# Altium PCB bms52Pcb.PcbDoc (part 2 of 2)
Units mm, origin at the board's own origin, x right, y up, seen from the top; angles counter-clockwise.
Board outline 103.58 x 54.94 mm, 2 copper layers (Top Layer, Bottom Layer); 108 components, 83 nets, 349 pads, 97 vias.
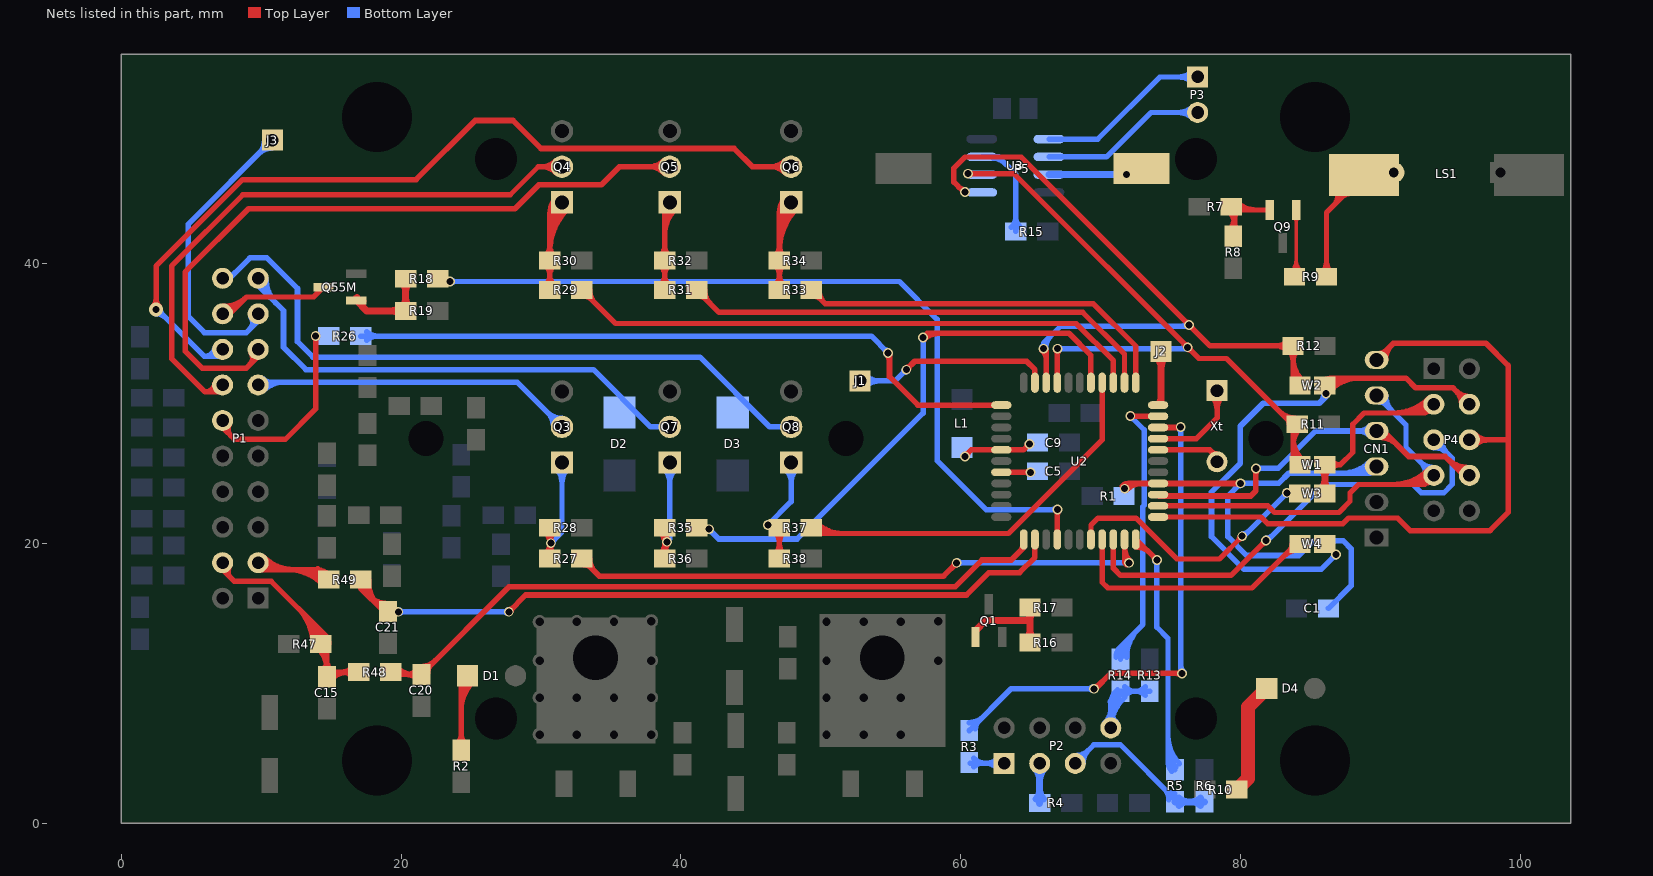
[diagram p2: the nets of this part, all layers, seen from the top]

## Via types
v1: diameter 0.7, hole 0.5, Top Layer to Bottom Layer, tented both sides, 77 vias
v2: diameter 1, hole 0.7, Top Layer to Bottom Layer, tented both sides, 16 vias
v3: diameter 0.7, hole 0.5, Top Layer to Bottom Layer, 2 vias
v4: diameter 1.4, hole 1, Top Layer to Bottom Layer, tented both sides, 1 vias
v5: diameter 1, hole 0.5, Top Layer to Bottom Layer, tented both sides, 1 vias

## Nets (pads, with @x,y where several pads share a name; then routed paths per layer and width w, separated by ;. In a path a pad name is that pad's centre, name@x,y a point inside that pad or via, vN(x,y) a via of type N, cw(c..) or ccw(c..) an arc to the next point about the centre after c; other vN are vias at no path point) (continued)
LCD01: U2.40 W3.1 | length 20.1
  Top Layer w0.381: U2.40@69.29,20.27 69.29,21.29 69.79,21.79 72.51,21.79 75.428,18.872 78.472,18.872 v1(80.1,20.5) ; v1@79.941,20.5 cw(c79.555,20.5) 79.828,20.228 cw(c80.1,19.955) v1@80.1,20.341
  Bottom Layer w0.381: v1@80.1,20.659 ccw(c80.1,21.286) 80.543,20.843 ; v1@80.15,20.45 v1(83.3,23.6) ; v1@83.141,23.6 cw(c82.755,23.6) 83.028,23.328 cw(c83.3,23.055) v1@83.3,23.441
LCD02: U2.41 W4.1 | length 20.4
  Top Layer w0.381: U2.41@70.09,20.27 70.09,17.21 70.5,16.8 80.8,16.8 83.954,19.954 W4.1@84.224,19.954 ; 83.094,19.094 cw(c84.097,18.09) W4.1@84.097,19.51 ; 83.44,19.44 ccw(c82.926,19.954) W4.1@83.653,19.954
LCD03: P4.5 U2.42 | length 36.6
  Top Layer w0.4: U2.42@70.89,20.27 70.89,18.21 71.4,17.7 79.3,17.7 v1(81.8,20.2) ; v1@81.65,20.2 cw(c81.288,20.2) 81.544,19.944 cw(c81.8,19.688) v1@81.8,20.05
  Bottom Layer w0.381: v1@81.8,20.1 85.9,24.2 92.3,24.2 92.9,23.6 94.5,23.6 95.1,24.2 95.1,26.08 P4.5@93.79,27.39 ; v1@81.8,20.359 ccw(c81.8,20.986) 82.243,20.543 ; P4.5@93.79,26.831 cw(c93.79,25.48) 94.745,26.435 cw(c95.7,27.39) P4.5@94.349,27.39
LCD04: CN1.6 P4.6 U2.1 | length 53.9
  Top Layer w0.381: U2.1@74.09,21.87 81.43,21.87 81.9,21.4 87.3,21.4 87.7,21.8 91.2,21.8 92.1,20.9 97.8,20.9
  Top Layer w0.4: CN1.6@89.7,33.1 90.9,34.3 97.5,34.3 99.1,32.7 99.1,22.2 97.8,20.9 ; CN1.6@89.9,33.55 ccw(c89.9,34.154) 90.327,33.727 ; CN1.6@90.35,33.1 cw(c91.919,33.1) 90.81,34.21 ; P4.6@96.33,27.39 99.09,27.39 ; P4.6@96.719,27.001 cw(c97.658,26.062) 97.658,27.39 cw(c97.658,28.718) P4.6@96.719,27.779
LCD05: CN1.5 P4.7 U2.2 | length 38.9
  Top Layer w0.381: U2.2@74.09,22.67 81.93,22.67 82.4,22.2 87,22.2 87.8,23 87.8,23.6 88.4,24.2 93.14,24.2 P4.7@93.79,24.85 ; 90.87,24.2 ccw(c90.87,27.77) P4.7@93.394,25.246 ; 91.79,24.2 ccw(c91.79,26.85) P4.7@93.664,24.976 ; 92.71,24.2 ccw(c92.71,25.93) P4.7@93.933,24.707
  Bottom Layer w0.381: CN1.5@89.7,30.56 91.8,28.46 91.8,26.84 P4.7@93.79,24.85 ; CN1.5@89.9,30.101 cw(c89.9,29.474) 90.343,29.917 ; CN1.5@90.359,30.56 ccw(c91.952,30.56) 90.826,29.434 ; P4.7@93.231,24.85 ccw(c91.88,24.85) 92.835,25.805 ccw(c93.79,26.76) P4.7@93.79,25.409
LCD06: CN1.4 P4.8 U2.3 | length 33.7
  Top Layer w0.4: U2.3@74.09,23.47 74.183,23.377 80.705,23.377 81.077,23.749 v1(81.077,25.349) ; U2.3@74.593,23.523 ccw(c74.945,23.875) 74.945,23.377 ; v1@80.971,25.243 cw(c80.715,24.987) 81.077,24.987 cw(c81.439,24.987) v1@81.183,25.243 ; CN1.4@89.7,28.02 90.18,28.02 92,26.2 94.6,26.2 95.95,24.85 P4.8@96.33,24.85 ; CN1.4@89.9,27.57 cw(c89.9,25.808) 91.146,27.054 ; 94.79,26.01 ccw(c96.265,27.484) P4.8@96.316,25.4 ; 95.45,25.35 ccw(c96.297,26.197) P4.8@96.326,25
  Bottom Layer w0.4: v1(81.077,25.349) 82.665,25.349 85.336,28.02 CN1.4@89.7,28.02 ; v1@81.183,25.243 cw(c81.439,24.987) 81.439,25.349 cw(c81.439,25.711) v1@81.183,25.455 ; CN1.4@89.182,27.702 ccw(c88.414,26.934) 88.414,28.02 ccw(c88.414,29.106) CN1.4@89.182,28.338
LEDINDICATOR01: P1.12 R26.1 | length 15.3
  Top Layer w0.381: P1.12@7.25,28.27 8.088,27.432 11.732,27.432 13.9,29.6 v1(13.9,34.8) ; P1.12@7.404,28.68 ccw(c7.867,28.41) 7.488,28.032 ; P1.12@7.733,28.488 ccw(c8.309,28.153) 7.838,27.682 ; v1@13.787,34.687 cw(c13.515,34.415) 13.9,34.415 cw(c14.285,34.415) v1@14.013,34.687
LEDINDICATORCTRL01: R26.2 U2.23 | length 51.5
  Top Layer w0.4: v1@54.694,33.494 cw(c54.196,32.996) 54.9,32.996 ; v1@54.9,33.6 54.9,31.9 56.93,29.87 U2.23@62.89,29.87
  Bottom Layer w0.4: R26.2@17.118,34.8 53.6,34.8 v1(54.8,33.6) ; R26.2@17.552,34.492 cw(c18.295,33.75) 18.295,34.8 cw(c18.295,35.85) R26.2@17.552,35.108 ; v1@54.65,33.6 ccw(c54.288,33.6) 54.544,33.856 ccw(c54.8,34.112) v1@54.8,33.75
LEDLIGHT01: P1.13 Q3.2 | length 28.6
  Bottom Layer w0.381: P1.13@9.79,30.81 10.476,31.496 28.314,31.496 Q3.2@31.5,28.31 ; P1.13@9.916,31.184 cw(c10.67,30.43) 10.67,31.496 ; P1.13@10.186,30.914 cw(c11.59,29.51) 11.59,31.496 ; P1.13@10.186,31.706 ccw(c10.692,32.212) 10.692,31.496 ; Q3.2@30.891,28.31 ccw(c29.419,28.31) 30.46,29.35 ccw(c31.5,30.391) Q3.2@31.5,28.919
LEDLIGHT02: P1.14 Q4.2 | length 46.3
  Top Layer w0.381: 6.443,30.81 ccw(c6.443,31.451) P1.14@7.074,31.341 ; P1.14@6.699,31.406 cw(c5.99,31.529) 5.99,30.81 ; P1.14@7.25,30.81 5.99,30.81 ; Q4.2@31.069,46.469 ccw(c30.029,45.429) 30.029,46.9 ccw(c30.029,48.371) Q4.2@31.069,47.331 ; Q4.2@31.5,46.9 29.8,46.9 27.8,44.9 8.7,44.9 3.61,39.809 3.61,33.191 5.99,30.81
LEDLIGHT03: P1.15 Q5.2 | length 52.6
  Top Layer w0.4: 9.202,32.762 ccw(c8.722,33.242) P1.15@9.312,33.578 ; P1.15@9.79,33.35 8.952,32.512 5.788,32.512 4.572,33.728 4.572,39.372 9.1,43.9 28.135,43.9 29.835,45.6 34.3,45.6 35.6,46.9 Q5.2@39.2,46.9 ; Q5.2@38.776,46.476 ccw(c37.751,45.451) 37.751,46.9 ccw(c37.751,48.349) Q5.2@38.776,47.324
LEDLIGHT04: P1.16 Q6.2 | length 66.8
  Top Layer w0.4: v5@2.288,36.912 ccw(c1.776,37.424) 2.5,37.424 ccw(c3.224,37.424) v5@2.712,36.912 ; v5(2.5,36.7) 2.5,39.8 8.674,45.974 21.074,45.974 25.3,50.2 28,50.2 30,48.2 43.8,48.2 45.1,46.9 Q6.2@47.87,46.9 ; Q6.2@47.446,46.476 ccw(c46.421,45.451) 46.421,46.9 ccw(c46.421,48.349) Q6.2@47.446,47.324
  Bottom Layer w0.381: v5@2.5,36.391 cw(c2.5,35.402) 3.199,36.101 ; v5(2.5,36.7) 2.6,36.7 5.95,33.35 ; v5@2.809,36.7 ccw(c3.315,36.7) 2.958,36.342 ; 6.418,33.35 ccw(c6.418,34.021) P1.16@7.075,33.886 ; P1.16@6.702,33.963 cw(c5.95,34.118) 5.95,33.35 ; P1.16@7.25,33.35 5.95,33.35
LEDLIGHTCTRL01: R27.2 U2.43 | length 46.8
  Top Layer w0.381: 71.69,18.814 ccw(c72.214,18.814) v1@71.843,18.443 ; U2.43@71.69,19.733 ccw(c73.133,19.733) v1@72.113,18.713 ; U2.43@71.69,20.27 71.69,18.91 v1(72,18.6)
  Top Layer w0.4: R27.2@32.918,18.9 34.164,17.654 58.754,17.654 v1(59.7,18.6) ; R27.2@33.045,18.465 cw(c33.045,17.721) 33.57,18.247 ; R27.2@33.48,18.9 ccw(c34.836,18.9) 33.877,17.941 ; v1@59.55,18.6 cw(c59.188,18.6) 59.444,18.344 cw(c59.7,18.088) v1@59.7,18.45
  Bottom Layer w0.381: v1(59.7,18.6) v1(72,18.6) ; v1@59.813,18.487 cw(c60.085,18.215) 60.085,18.6 cw(c60.085,18.985) v1@59.813,18.713 ; v1@71.887,18.487 ccw(c71.615,18.215) 71.615,18.6 ccw(c71.615,18.985) v1@71.887,18.713
LEDLIGHTCTRL02: R29.2 U2.14 | length 43.3
  Top Layer w0.381: R29.2@32.918,38.1 35.318,35.7 68.237,35.7 70.89,33.047 U2.14@70.89,31.47 ; R29.2@33.045,37.655 cw(c33.045,36.889) 33.587,37.431 ; R29.2@33.489,38.1 ccw(c34.869,38.1) 33.893,37.124
LEDLIGHTCTRL03: R31.2 U2.13 | length 36.2
  Top Layer w0.381: R31.2@41.118,38.1 42.718,36.5 68.707,36.5 71.69,33.517 U2.13@71.69,31.47 ; R31.2@41.245,37.655 cw(c41.245,36.889) 41.787,37.431 ; R31.2@41.689,38.1 ccw(c43.069,38.1) 42.093,37.124
LEDLIGHTCTRL04: R33.2 U2.12 | length 29.1
  Top Layer w0.381: R33.2@49.318,38.1 50.318,37.1 69.478,37.1 72.49,34.088 U2.12@72.49,31.47 ; R33.2@49.445,37.655 cw(c49.445,36.889) 49.987,37.431 ; R33.2@49.889,38.086 ccw(c51.137,38.047) 50.254,37.164
LIGHTADC01: C20.2 R48.2 U2.34 | length 55
  Top Layer w0.381: R48.2@19.268,10.8 19.443,10.625 C20.2@21.458,10.625 ; R48.2@19.71,10.486 cw(c20.047,10.148) 20.047,10.625 ; R48.2@19.71,11.114 ccw(c20.89,12.295) C20.2@20.89,10.625 ; C20.2@21.143,10.311 ccw(c20.384,9.552) 20.384,10.625 ccw(c20.384,11.699) C20.2@21.143,10.94
  Top Layer w0.4: C20.2@21.458,10.625 27.732,16.9 59.6,16.9 61.5,18.8 63.6,18.8 64.49,19.69 U2.34@64.49,20.27 ; C20.2@21.458,11.187 ccw(c21.458,12.544) 22.417,11.585 ; C20.2@21.893,10.752 cw(c22.636,10.752) 22.11,11.278 ; 64.27,19.47 ccw(c63.92,19.82) U2.34@64.415,19.82
LIGHTSENS01: C15.1 P1.4 R47.2 R48.1 | length 31.4
  Top Layer w0.381: P1.4@7.25,18.11 8.088,17.272 10.728,17.272 14.7,13.3 C15.1@14.7,10.461 15.039,10.8 R48.1@16.982,10.8 ; P1.4@7.404,18.52 ccw(c7.867,18.25) 7.488,17.872 ; P1.4@7.733,18.328 ccw(c8.309,17.993) 7.838,17.522 ; 12.634,15.366 cw(c10.068,12.8) R47.2@13.697,12.8 ; 13.284,14.716 cw(c11.369,12.8) R47.2@14.078,12.8 ; 13.935,14.065 cw(c12.669,12.8) R47.2@14.459,12.8 ; R47.2@14.081,12.486 cw(c12.587,10.991) C15.1@14.7,10.991 ; R47.2@14.35,12.755 cw(c13.507,11.911) 14.7,11.911 ; C15.1@14.386,10.902 ccw(c13.627,11.661) 14.7,11.661 ccw(c15.773,11.661) C15.1@15.014,10.902 ; R47.2@14.585,13.415 cw(c13.97,12.8) R47.2@14.84,12.8 ; C15.1@14.745,10.543 cw(c15.366,9.922) 15.366,10.8 ; C15.1@15.014,10.273 cw(c16.286,9.002) R48.1@16.286,10.8 ; R48.1@16.541,10.486 ccw(c15.782,9.727) 15.782,10.8 ccw(c15.782,11.873) R48.1@16.541,11.114
NetC5_1: C5.1 U2.29 | length 2.6
  Top Layer w0.4: U2.29@62.89,25.07 v1(64.97,25.07) ; v1@64.864,24.964 ccw(c64.608,24.708) 64.608,25.07 ccw(c64.608,25.432) v1@64.864,25.176
NetC9_2: C9.2 L1.1 U2.27 | length 6
  Top Layer w0.381: v1(60.3,26.2) 60.3,26.24 60.73,26.67 U2.27@62.89,26.67 64.47,26.67 v1(64.9,27.1) ; v1@60.459,26.2 cw(c60.941,26.2) 60.601,26.541 ; v1@64.741,27.1 cw(c64.355,27.1) 64.628,26.828 cw(c64.9,26.555) v1@64.9,26.94
NetD1_1: D1.1 R2.1 | length 11.9
  Top Layer w0.381: R2.1@23.986,5.659 ccw(c23.227,6.418) 24.3,6.418 ccw(c25.373,6.418) R2.1@24.614,5.659 ; R2.1@24.3,5.218 24.3,10.079 D1.1@24.748,10.527 ; 24.3,8.067 cw(c27.208,8.067) D1.1@25.152,10.123 ; 24.3,8.986 cw(c26.288,8.986) D1.1@24.882,10.392 ; D1.1@24.3,9.906 cw(c25.368,9.906) D1.1@24.613,10.662
NetD4_1: D4.1 R10.1 | length 8.1
  Top Layer w1: R10.1@79.718,2.4 80.518,3.2 80.518,8.297 D4.1@81.848,9.627
NetLS1_2: LS1.2 LS1.2A R9.2 | length 14.9
  Top Layer w0.381: R9.2@85.811,39.357 ccw(c85.052,40.116) 86.125,40.116 ccw(c87.199,40.116) R9.2@86.44,39.357 ; R9.2@86.125,39.042 86.125,43.625 LS1.2@88.8,46.3 ; 86.625,44.125 ccw(c85.855,44.896) LS1.2@86.738,45.533 ; 86.942,44.442 ccw(c86.223,45.161) LS1.2@87.047,45.756 ; 87.258,44.758 ccw(c86.59,45.426) LS1.2@87.356,45.979 ; 87.272,44.772 cw(c87.8,44.243) LS1.2@87.8,44.99
NetP2_1: P2.1 R3.2 | length 6.2
  Bottom Layer w0.381: R3.2@60.662,4.27 P2.1@63.09,4.27 ; R3.2@60.914,4.017 cw(c61.524,3.407) 61.524,4.27 ; R3.2@60.914,4.646 ccw(c61.822,5.554) 61.822,4.27 ; P2.1@62.694,3.874 ccw(c61.739,2.919) 61.739,4.27 ccw(c61.739,5.621) P2.1@62.694,4.666
NetP2_3: P2.3 R4.2 | length 6.2
  Bottom Layer w0.5: P2.3@65.276,3.916 cw(c64.423,3.063) 65.63,3.063 cw(c66.837,3.063) P2.3@65.984,3.916 ; R4.2@65.359,1.715 ccw(c64.706,2.368) 65.63,2.368 ; 65.63,2.376 ccw(c66.565,2.376) R4.2@65.904,1.715 ; P2.3@65.63,4.27 65.63,1.402 R4.2@65.632,1.4
NetP2_5: P2.5 R5.1 R6.2 | length 18.3
  Bottom Layer w0.381: P2.5@68.17,4.27 69.5,5.6 71.4,5.6 75.3,1.7 R5.1@75.3,1.527 ; P2.5@68.17,4.829 ccw(c68.17,6.18) 69.125,5.225 ccw(c70.08,4.27) P2.5@68.729,4.27 ; 74.509,2.491 cw(c73.671,1.654) R5.1@74.855,1.654 ; 74.62,2.38 ccw(c75.3,3.06) R5.1@75.3,2.098
  Bottom Layer w0.5: R5.1@75.3,1.527 R6.2@77.4,1.527 ; R5.1@75.572,1.255 cw(c76.229,0.597) 76.229,1.527 cw(c76.229,2.456) R5.1@75.572,1.799 ; R6.2@77.128,1.255 ccw(c76.471,0.597) 76.471,1.527 ccw(c76.471,2.456) R6.2@77.128,1.799
NetP2_8: P2.8 R13.2 R14.2 | length 17.5
  Bottom Layer w0.381: P2.8@70.314,7.206 ccw(c69.359,8.161) 70.71,8.161 ccw(c72.061,8.161) P2.8@71.106,7.206 ; 70.647,8.678 cw(c71.151,8.173) R14.2@71.305,8.871 ; P2.8@70.71,6.716 cw(c73.785,6.716) R14.2@71.701,8.978 ; P2.8@70.71,6.81 70.71,8.742 R14.2@71.4,9.432 R13.2@73.5,9.432 ; 70.71,7.586 cw(c72.984,7.586) R14.2@71.443,9.258 ; 70.71,8.455 cw(c72.183,8.455) R14.2@71.185,9.538 ; 70.731,8.763 ccw(c70.189,9.305) R14.2@70.956,9.305 ; R14.2@71.714,9.117 cw(c72.473,8.359) 72.473,9.432 cw(c72.473,10.505) R14.2@71.714,9.746 ; R13.2@73.186,9.117 ccw(c72.427,8.359) 72.427,9.432 ccw(c72.427,10.505) R13.2@73.186,9.746
NetP3_1: P3.1 U3.1 | length 14.6
  Bottom Layer w0.381: U3.1@66.29,48.875 69.775,48.875 74.216,53.316 P3.1@76.914,53.316 ; P3.1@76.518,52.921 ccw(c75.563,51.965) 75.563,53.316 ccw(c75.563,54.667) P3.1@76.518,53.712
NetP3_2: P3.2 U3.2 | length 14.1
  Bottom Layer w0.381: U3.2@66.29,47.605 70.405,47.605 73.576,50.776 P3.2@76.914,50.776 ; P3.2@76.518,50.381 ccw(c75.563,49.425) 75.563,50.776 ccw(c75.563,52.127) P3.2@76.518,51.172
NetP4_3: P4.3 W1.2 W3.2 | length 23.3
  Top Layer w0.381: W1.2@86.002,25.614 87.114,25.614 ; W1.2@86.463,25.32 cw(c87.114,24.746) 87.114,25.614 ; W1.2@86.463,25.908 ccw(c87.114,26.481) 87.114,25.614 ; 90.918,29.3 ccw(c90.918,32.802) P4.3@93.394,30.326 ; 91.838,29.3 ccw(c91.838,31.882) P4.3@93.664,30.056 ; 92.758,29.3 ccw(c92.758,30.962) P4.3@93.933,29.787 ; P4.3@93.79,29.93 93.16,29.3 88.8,29.3 88,28.5 88,26.5 87.114,25.614
  Top Layer w0.5: W3.2@85.717,23.826 ccw(c85.027,24.516) 86.002,24.516 ; W1.2@85.73,25.341 cw(c85.073,24.684) 86.002,24.684 cw(c86.932,24.684) W1.2@86.275,25.341 ; W3.2@86.002,23.567 W1.2@86.002,25.614 ; 86.002,24.451 ccw(c86.886,24.451) W3.2@86.261,23.826
NetP4_4: P4.4 W2.2 W4.2 | length 45.1
  Top Layer w0.4: W2.2@85.871,31.531 cw(c86.52,30.883) W2.2@86.52,31.8 ; W2.2@86.002,31.273 86.529,31.8 91.8,31.8 92.5,31.1 95.16,31.1 P4.4@96.33,29.93 ; W2.2@86.154,31.248 cw(c87.486,29.917) 87.486,31.8 ; W2.2@86.437,30.966 cw(c88.451,28.951) 88.451,31.8 ; P4.4@95.78,29.93 ccw(c94.452,29.93) 95.391,30.869 ccw(c96.33,31.808) P4.4@96.33,30.48
  Bottom Layer w0.4: 85.703,30.103 ccw(c85.105,30.7) v1@85.95,30.7 ; v1@86.1,30.5 85.6,30 81.6,30 79.959,28.359 79.959,25.705 77.902,23.647 77.902,20.472 80.239,18.136 85.736,18.136 v1(86.8,19.2) ; v1@86.65,19.2 cw(c86.288,19.2) 86.544,18.944 cw(c86.8,18.688) v1@86.8,19.05
  other v1: 86.1,30.7
NetP5_2: P5.2 U3.3 | length 5.5
  Bottom Layer w0.5: U3.3@66.29,46.335 v1(71.835,46.335)
NetP6_1: U2.8 Xt.1 | length 8.8
  Top Layer w0.4: U2.8@74.09,27.47 76.822,27.47 78.308,28.956 Xt.1@78.308,30.8 ; Xt.1@77.911,30.511 cw(c76.952,29.552) 78.308,29.552 ; 78.308,29.592 cw(c79.608,29.592) Xt.1@78.689,30.511
NetP6_3: U2.7 Xt.3 | length 4.6
  Top Layer w0.4: U2.7@74.09,26.67 77.775,26.67 Xt.3@78.112,26.332 ; 77.916,26.529 ccw(c78.3,26.914) Xt.3@78.3,26.37
NetQ1_1: Q1.1 R16.2 R17.2 | length 10.6
  Top Layer w0.381: R16.2@64.536,13.296 R16.2@64.932,12.9
  Top Layer w0.5: Q1.1@61.044,13.296 61.044,13.744 61.771,14.471 64.861,14.471 64.932,14.4 ; R16.2@64.659,13.172 ccw(c64.002,13.83) 64.932,13.83 ccw(c65.861,13.83) R16.2@65.204,13.172 ; R17.2@64.659,15.128 cw(c64.002,14.471) 64.932,14.471 cw(c65.861,14.471) R17.2@65.204,15.128 ; R16.2@64.932,12.9 64.932,14.4 ; R17.2@64.932,15.4 64.932,14.4
NetQ3_1: Q3.1 R27.1 R28.2 | length 15.6
  Top Layer w0.381: R27.1@30.317,19.214 ccw(c29.559,19.973) 30.632,19.973 ccw(c31.705,19.973) R27.1@30.946,19.214 ; R28.2@30.317,20.786 cw(c29.559,20.027) 30.632,20.027 cw(c31.705,20.027) R28.2@30.946,20.786 ; R27.1@30.632,18.9 R28.2@30.632,21.1 ; R27.1@30.632,19.45 cw(c31.25,19.45) v1@30.813,19.887 ; R28.2@30.632,20.55 ccw(c31.25,20.55) v1@30.813,20.113
  Bottom Layer w0.381: v1(30.7,20) 31.5,20.8 Q3.1@31.5,25.77 ; v1@30.7,20.159 ccw(c30.7,20.545) 30.972,20.272 ccw(c31.245,20) v1@30.859,20 ; Q3.1@31.069,25.339 cw(c30.029,24.299) 31.5,24.299 cw(c32.971,24.299) Q3.1@31.931,25.339
NetQ4_1: Q4.1 R29.1 R30.2 | length 23
  Top Layer w0.381: R29.1@30.317,38.414 ccw(c29.559,39.173) 30.632,39.173 ccw(c31.705,39.173) R29.1@30.946,38.414 ; R30.2@30.317,39.886 cw(c29.559,39.127) 30.632,39.127 cw(c31.705,39.127) R30.2@30.946,39.886 ; R30.2@30.317,40.514 ccw(c29.559,41.273) 30.632,41.273 ccw(c31.705,41.273) R30.2@30.946,40.514 ; R29.1@30.632,38.1 R30.2@30.632,40.2 30.632,43.492 ; R30.2@30.632,40.792 cw(c35.068,40.792) Q4.1@31.931,43.929 ; 30.632,41.712 cw(c34.148,41.712) Q4.1@31.662,44.198 ; 30.632,42.632 cw(c33.228,42.632) Q4.1@31.392,44.468 ; 30.632,43.552 cw(c32.308,43.552) Q4.1@31.123,44.737 ; Q4.1@30.896,44.277 cw(c29.972,44.151) 30.632,43.492 ; Q4.1@31.417,43.756 ccw(c31.291,42.832) 30.632,43.492 ; Q4.1@31.5,44.36 30.632,43.492
NetQ5_1: Q5.1 R31.1 R32.2 | length 15
  Top Layer w0.381: R31.1@38.517,38.414 ccw(c37.759,39.173) 38.832,39.173 ccw(c39.905,39.173) R31.1@39.146,38.414 ; R32.2@38.517,39.886 cw(c37.759,39.127) 38.832,39.127 cw(c39.905,39.127) R32.2@39.146,39.886 ; R32.2@38.517,40.514 ccw(c37.759,41.273) 38.832,41.273 ccw(c39.905,41.273) R32.2@39.146,40.514 ; R31.1@38.832,38.1 R32.2@38.832,40.2 38.832,43.992 Q5.1@39.2,44.36 ; 38.832,41.999 cw(c41.561,41.999) Q5.1@39.631,43.929 ; 38.832,42.919 cw(c40.641,42.919) Q5.1@39.362,44.198
NetQ6_1: Q6.1 R33.1 R34.2 | length 22.6
  Top Layer w0.381: R33.1@46.717,38.414 ccw(c45.959,39.173) 47.032,39.173 ccw(c48.105,39.173) R33.1@47.346,38.414 ; R34.2@46.717,39.886 cw(c45.959,39.127) 47.032,39.127 cw(c48.105,39.127) R34.2@47.346,39.886 ; R34.2@46.717,40.514 ccw(c45.959,41.273) 47.032,41.273 ccw(c48.105,41.273) R34.2@47.346,40.514 ; R33.1@47.032,38.1 R34.2@47.032,40.2 47.032,43.522 ; 47.032,40.865 cw(c51.365,40.865) Q6.1@48.301,43.929 ; 47.032,41.784 cw(c50.446,41.784) Q6.1@48.032,44.198 ; 47.032,42.704 cw(c49.526,42.704) Q6.1@47.762,44.468 ; 47.032,43.624 cw(c48.606,43.624) Q6.1@47.493,44.737 ; Q6.1@47.269,44.26 cw(c46.432,44.122) 47.032,43.522 ; Q6.1@47.77,43.759 ccw(c47.631,42.922) 47.032,43.522 ; Q6.1@47.87,44.36 47.032,43.522
NetQ7_1: Q7.1 R35.1 R36.2 | length 16
  Top Layer w0.381: R36.2@38.517,19.214 ccw(c37.759,19.973) 38.832,19.973 ccw(c39.905,19.973) R36.2@39.146,19.214 ; R35.1@38.517,20.786 cw(c37.759,20.027) 38.832,20.027 cw(c39.905,20.027) R35.1@39.146,20.786 ; R36.2@38.832,18.9 R35.1@38.832,21.1 ; R36.2@38.832,19.308 cw(c39.792,19.308) v1@39.113,19.987 ; R35.1@38.832,20.892 ccw(c39.792,20.892) v1@39.113,20.213
  Bottom Layer w0.381: Q7.1@38.769,25.339 cw(c37.729,24.299) 39.2,24.299 cw(c40.671,24.299) Q7.1@39.631,25.339 ; v1@38.887,20.213 ccw(c38.132,20.968) 39.2,20.968 ; v1(39,20.1) 39.2,20.3 Q7.1@39.2,25.77
NetQ8_1: Q8.1 R37.1 R38.2 | length 13.6
  Top Layer w0.381: R38.2@46.717,19.214 ccw(c45.959,19.973) 47.032,19.973 ccw(c48.105,19.973) R38.2@47.346,19.214 ; R37.1@46.717,20.786 cw(c45.959,20.027) 47.032,20.027 cw(c48.105,20.027) R37.1@47.346,20.786 ; R38.2@47.032,18.9 R37.1@47.032,21.1
  Bottom Layer w0.381: v1(46.2,21.3) 47.87,22.97 Q8.1@47.87,25.77 ; v1@46.2,21.459 ccw(c46.2,21.845) 46.472,21.572 ccw(c46.745,21.3) v1@46.359,21.3 ; Q8.1@47.439,25.339 cw(c46.399,24.299) 47.87,24.299 cw(c49.341,24.299) Q8.1@48.301,25.339
NetQ9_1: Q9.1 R9.1 | length 7.7
  Top Layer w0.254: R9.1@83.607,39.402 ccw(c82.766,40.243) 83.956,40.243 ; Q9.1@83.833,43.257 cw(c83.538,42.962) 83.956,42.962 cw(c84.373,42.962) Q9.1@84.078,43.257 ; R9.1@83.956,39.159 Q9.1@83.956,43.804 ; 83.956,39.681 ccw(c84.605,39.681) R9.1@84.146,39.222 ; 83.956,40.294 ccw(c85.218,40.294) R9.1@84.326,39.402
NetQ9_2: Q9.2 R7.2 R8.2 | length 10
  Top Layer w0.381: R7.2@79.138,43.728 cw(c78.111,42.701) 79.563,42.701 ; R8.2@79.143,42.367 ccw(c78.129,43.381) 79.563,43.381 ; R8.2@79.458,41.925 79.563,42.031 79.563,43.804 Q9.2@82.056,43.804 ; R7.2@79.497,44.087 ccw(c80.18,44.77) 80.18,43.804 ; 79.563,42.87 ccw(c80.275,42.87) R8.2@79.772,42.367 ; 79.563,43.237 cw(c80.258,43.237) R7.2@79.767,43.728 ; R7.2@79.767,44.357 ccw(c81.1,45.69) 81.1,43.804
NetQ55M_1: Q55M.1 R18.2 R19.2 | length 11.4
  Top Layer w0.5: Q55M.1@16.804,37.344 17.549,36.6 R19.2@20.332,36.6 R18.2@20.332,38.9 ; Q55M.1@16.842,37.574 ccw(c17.059,37.446) Q55M.1@16.881,37.268 ; Q55M.1@17.272,37.319 ccw(c17.63,37.107) 17.336,36.813 ; R19.2@19.932,36.328 ccw(c19.275,35.671) 19.275,36.6 ccw(c19.275,37.53) R19.2@19.932,36.872 ; R19.2@20.059,36.872 ccw(c19.402,37.53) 20.332,37.53 ccw(c21.261,37.53) R19.2@20.604,36.872 ; R18.2@20.059,38.628 cw(c19.402,37.971) 20.332,37.971 cw(c21.261,37.971) R18.2@20.604,38.628
NetR15_2: R15.2 U3.7 | length 10.3
  Bottom Layer w0.381: U3.7@61.49,47.605 62.695,47.605 63.922,46.378 R15.2@63.922,42.27 ; U3.7@62.29,47.495 cw(c62.29,46.253) 63.168,47.132 ; U3.7@62.335,47.505 cw(c62.542,47.047) 62.897,47.403 ; R15.2@63.607,42.584 ccw(c62.849,43.343) 63.922,43.343 ccw(c64.995,43.343) R15.2@64.236,42.584
POMP01: D2.2 P1.19 Q7.2 | length 38.4
  Bottom Layer w0.4: P1.19@9.79,38.43 11.6,36.62 11.6,34 13.2,32.4 33.742,32.4 37.832,28.31 Q7.2@39.2,28.31 ; P1.19@9.94,38.93 ccw(c11.509,38.93) 10.4,37.82 ; P1.19@10.34,38.93 ccw(c12.875,38.93) 11.082,37.138
POMP02: D3.2 P1.20 Q8.2 | length 48.7
  Bottom Layer w0.4: P1.20@7.25,38.43 9.206,40.386 10.414,40.386 12.6,38.2 12.6,34.4 13.7,33.3 41.351,33.3 46.341,28.31 Q8.2@47.87,28.31
POMPCTRL01: R35.2 U2.16 | length 41.7
  Top Layer w0.4: v1(57.3,34.7) 57.6,35 67.709,35 69.29,33.419 U2.16@69.29,31.47 ; v1@57.406,34.594 cw(c58.386,33.614) 58.386,35
  Bottom Layer w0.4: v1@42,20.85 cw(c42,20.488) 42.256,20.744 cw(c42.512,21) v1@42.15,21 ; v1(42,21) 42.7,20.3 48.3,20.3 57.3,29.3 v1(57.3,34.7) ; v1@57.194,34.594 cw(c56.938,34.338) 57.3,34.338 cw(c57.662,34.338) v1@57.406,34.594
POMPCTRL02: R37.2 U2.15 | length 30.9
  Top Layer w0.381: R37.2@49.318,21.1 49.718,20.7 63.4,20.7 70.09,27.39 U2.15@70.09,31.47 ; R37.2@49.49,21.145 ccw(c50.564,22.219) 50.564,20.7 ; R37.2@49.759,21.414 ccw(c51.483,23.139) 51.483,20.7
RELAY01: P1.18 Q55M.3 | length 11.2
  Top Layer w0.381: P1.18@7.25,35.89 8.952,37.592 ; P1.18@7.259,36.568 ccw(c7.333,37.999) 8.346,36.986 ; P1.18@7.279,36.949 ccw(c7.392,39.152) 8.952,37.592 ; Q55M.3@14.454,38.294 13.752,37.592 8.952,37.592
RELAYCTRL: R18.1 U2.37 | length 60
  Top Layer w0.381: v1@66.787,22.287 cw(c66.539,22.039) 66.89,22.039 ; U2.37@66.89,20.27 v1@66.89,22.39 ; 66.89,21.991 cw(c67.309,21.991) v1@67.013,22.287
  Bottom Layer w0.381: v1(23.5,38.7) 55.6,38.7 58.3,36 58.3,25.9 61.8,22.4 v1(66.9,22.4) ; v1@23.613,38.587 cw(c23.885,38.315) 23.885,38.7 cw(c23.885,39.085) v1@23.613,38.813 ; v1@66.787,22.287 ccw(c66.515,22.015) 66.515,22.4 ccw(c66.515,22.785) v1@66.787,22.513
RES1: J1.1 U2.21 | length 17.5
  Top Layer w0.4: v1(56.1,32.4) 56.7,33 64.7,33 65.29,32.41 U2.21@65.29,31.47 ; v1@56.1,32.55 ccw(c56.1,32.912) 56.356,32.656 ccw(c56.612,32.4) v1@56.25,32.4
  Bottom Layer w0.4: J1.1@52.8,31.6 55.3,31.6 v1(56.1,32.4) ; J1.1@53.189,31.211 cw(c54.128,30.272) 54.128,31.6 cw(c54.128,32.928) J1.1@53.189,31.989 ; v1@55.95,32.4 cw(c55.588,32.4) 55.844,32.144 cw(c56.1,31.888) v1@56.1,32.25
RES2: J2.1 U2.11 | length 6.4
  Top Layer w0.5: J2.1@73.946,33.346 cw(c73.093,32.493) 74.3,32.493 cw(c75.507,32.493) J2.1@74.654,33.346 ; U2.11@74.072,29.888 ccw(c73.523,30.437) 74.3,30.437 ; U2.11@74.09,29.87 74.3,30.08 J2.1@74.3,33.7
RES3: J3.1 P1.17 | length 23.9
  Bottom Layer w0.4: 9.202,35.302 ccw(c8.722,35.782) P1.17@9.312,36.118 ; P1.17@9.79,35.89 8.952,35.052 5.948,35.052 4.8,36.2 4.8,42.8 J3.1@10.8,48.8 ; J3.1@10.25,48.8 cw(c8.922,48.8) 9.861,47.861 cw(c10.8,46.922) J3.1@10.8,48.25
RESET: C1.1 CN1.3 R1.2 U2.4 | length 44.7
  Top Layer w0.4: v1@71.523,24.077 cw(c71.99,23.61) 71.99,24.27 ; v1@71.7,24.05 ccw(c71.7,24.412) 71.956,24.156 ccw(c72.212,23.9) v1@71.85,23.9 ; v1@71.8,24 72.07,24.27 U2.4@74.09,24.27 v1@79.959,24.27 ; v1@71.806,23.794 cw(c72.955,22.645) 72.955,24.27 ; 79.593,24.27 ccw(c79.593,24.674) v1@79.879,24.388
  Bottom Layer w0.4: v1@79.835,24.282 cw(c79.472,24.282) 79.729,24.026 cw(c79.985,23.77) v1@79.985,24.132 ; v1(79.985,24.282) 79.07,23.368 79.07,20.469 80.413,19.126 84.15,19.126 85.192,20.168 87.325,20.168 87.884,19.609 87.884,16.966 C1.1@86.261,15.342 ; v1@80.01,24.3 82.72,24.3 83.42,25 89.22,25 CN1.3@89.7,25.48 ; v1@80.091,24.176 cw(c80.389,23.878) 80.389,24.3 ; 87.255,25 ccw(c87.255,27.725) CN1.3@89.182,25.798 ; 88.22,25 ccw(c88.22,26.76) CN1.3@89.465,25.515
  other v1: 71.7,23.9
SCL: R11.2 U2.19 U3.6 W1.1 | length 55.3
  Top Layer w0.381: v1(60.5,46.4) 63.8,46.4 77.002,33.198 78.974,33.198 83.732,28.44 83.732,26.106 W1.1@84.224,25.614 ; v1@60.613,46.287 cw(c60.885,46.015) 60.885,46.4 cw(c60.885,46.785) v1@60.613,46.513 ; v1@66.787,33.787 cw(c66.539,33.539) 66.89,33.539 ; U2.19@66.89,31.47 v1@66.89,33.89 ; 66.89,33.491 cw(c67.309,33.491) v1@67.013,33.787 ; v1@76.041,34 ccw(c75.655,34) 75.928,34.272 ccw(c76.2,34.545) v1@76.2,34.159 ; v1@76.2,33.841 cw(c76.2,33.455) 76.472,33.728 cw(c76.745,34) v1@76.359,34 ; 82.749,29.423 ccw(c83.905,30.579) R11.2@83.905,28.945 ; R11.2@83.31,28.862 cw(c82.949,28.5) R11.2@83.46,28.5 ; R11.2@83.59,28.186 cw(c83.249,27.845) 83.732,27.845 ; 83.732,26.65 ccw(c85.133,26.65) W1.1@84.142,25.658 ; 83.732,27.009 cw(c85.395,27.009) R11.2@84.219,28.186 ; 83.732,27.569 ccw(c86.053,27.569) W1.1@84.412,25.928
  Bottom Layer w0.381: v1(66.9,33.9) v1@76.2,33.9 ; v1@67.013,33.787 cw(c67.285,33.515) 67.285,33.9 cw(c67.285,34.285) v1@67.013,34.013 ; 75.574,33.9 ccw(c75.574,34.626) v1@76.087,34.113
  other v1: 76.2,34
SDA: R12.1 U2.20 U3.5 W2.1 | length 60.2
  Top Layer w0.381: 59.857,45.443 ccw(c60.3,45.886) v1@60.3,45.26 ; v1@60.2,45.1 59.5,45.8 59.5,46.8 60.3,47.6 64.3,47.6 77.8,34.1 R12.1@83.732,34.1 83.732,31.766 W2.1@84.224,31.273 ; v1@65.787,33.787 cw(c65.056,33.056) 66.09,33.056 ; v1(65.9,33.9) 66.09,33.71 U2.20@66.09,31.47 ; v1@76.141,35.6 ccw(c75.755,35.6) 76.028,35.872 ccw(c76.3,36.145) v1@76.3,35.759 ; v1@76.3,35.441 cw(c76.3,35.055) 76.572,35.328 cw(c76.845,35.6) v1@76.459,35.6 ; R12.1@83.29,33.786 ccw(c82.532,33.027) 82.532,34.1 ccw(c82.532,35.173) R12.1@83.29,34.414 ; R12.1@83.417,33.786 cw(c82.659,33.027) 83.732,33.027 cw(c84.805,33.027) R12.1@84.046,33.786 ; 83.732,32.309 ccw(c85.133,32.309) W2.1@84.142,31.318 ; 83.732,33.229 ccw(c86.053,33.229) W2.1@84.412,31.588
  Bottom Layer w0.381: v1@65.787,34.013 ccw(c65.515,34.285) 65.9,34.285 ccw(c66.285,34.285) v1@66.013,34.013 ; v1@66,33.8 v1(65.9,33.9) 65.9,34.3 67.1,35.5 v1@76.3,35.5 ; v1@66.059,33.9 cw(c67.41,33.9) 66.455,34.855 ; 75.674,35.5 ccw(c75.674,36.226) v1@76.187,35.713
  other v1: 76.3,35.6 60.3,45.1
TEMPADC01: C21.2 R49.2 U2.35 | length 59.3
  Top Layer w0.4: R49.2@17.113,17.4 17.113,16.787 18.775,15.125 C21.2@19.058,15.125 ; R49.2@17.275,17.398 ccw(c18.949,17.321) 17.764,16.136 ; 17.615,16.285 ccw(c19.058,17.727) C21.2@19.058,15.687 ; R49.2@17.674,17.38 ccw(c20.173,17.264) 18.405,15.495 ; 18.298,15.602 ccw(c19.058,16.362) C21.2@19.058,15.287 ; v1(27.7,15.1) 28.9,16.3 60.4,16.3 62,17.9 64.2,17.9 65.29,18.99 U2.35@65.29,20.27 ; v1@27.7,15.25 ccw(c27.7,15.612) 27.956,15.356 ccw(c28.212,15.1) v1@27.85,15.1
  Bottom Layer w0.4: v1(19.8,15.1) v1(27.7,15.1) ; v1@19.906,14.994 cw(c20.162,14.738) 20.162,15.1 cw(c20.162,15.462) v1@19.906,15.206 ; v1@27.594,14.994 ccw(c27.338,14.738) 27.338,15.1 ccw(c27.338,15.462) v1@27.594,15.206
TEMPSENS01: P1.3 R49.1 | length 17.5
  Top Layer w0.4: P1.3@9.613,18.433 ccw(c10.394,19.214) 10.394,18.11 ; P1.3@9.79,18.11 14.117,18.11 R49.1@14.827,17.4 ; P1.3@9.896,18.716 ccw(c11.359,20.179) 11.359,18.11 ; P1.3@10.179,18.999 ccw(c12.325,21.145) 12.325,18.11 ; 11.936,18.11 cw(c11.936,14.636) R49.1@14.392,17.092 ; 12.901,18.11 cw(c12.901,15.601) R49.1@14.675,17.375 ; 13.867,18.11 cw(c13.867,16.567) R49.1@14.958,17.658 ; 14.053,18.173 cw(c13.496,17.616) R49.1@14.272,17.477 ; 14.174,18.053 ccw(c14.7,18.579) R49.1@14.7,17.835
WIFICHIPRESET: R5.2 U2.44 | length 24.7
  Top Layer w0.381: U2.44@72.49,19.735 cw(c72.49,18.349) 73.471,19.329 ; U2.44@72.49,20.116 cw(c72.49,19.649) 72.82,19.98 ; U2.44@72.49,20.27 72.53,20.27 v1(74,18.8) ; v1@73.841,18.8 ccw(c73.455,18.8) 73.728,19.072 ccw(c74,19.345) v1@74,18.959
  Bottom Layer w0.381: v1@73.887,18.687 cw(c73.615,18.415) 74,18.415 cw(c74.385,18.415) v1@74.113,18.687 ; v1(74,18.8) 74,14 74.8,13.2 74.8,4.313 R5.2@75.3,3.813 ; R5.2@74.8,4.38 ccw(c75.74,4.38) R5.2@75.075,3.715 ; 74.8,5.3 ccw(c76.66,5.3) R5.2@75.345,3.985 ; 74.8,6.22 ccw(c77.58,6.22) R5.2@75.614,4.254
WIFIRX: R14.1 U2.10 | length 27
  Top Layer w0.381: v1(72.1,29.1) 72.13,29.07 U2.10@74.09,29.07 ; v1@72.213,29.213 ccw(c72.557,29.557) 72.557,29.07
  Bottom Layer w0.381: R14.1@71.083,11.845 cw(c72.14,11.845) 71.392,12.592 ; R14.1@71.184,12.233 ccw(c70.98,12.6) 71.4,12.6 ; R14.1@71.4,11.718 71.4,12.6 ; R14.1@71.464,11.845 cw(c73.441,11.845) 72.043,13.243 ; R14.1@71.616,12.233 cw(c71.82,12.6) 71.4,12.6 ; R14.1@71.845,11.845 cw(c74.741,11.845) 72.693,13.893 ; v1@72.1,28.941 cw(c72.1,28.555) 72.372,28.828 cw(c72.645,29.1) v1@72.259,29.1 ; v1(72.1,29.1) 73.1,28.1 73.1,22.7 73,22.6 73,14.2 71.4,12.6
WIFITX: R3.1 U2.9 | length 40.9
  Top Layer w0.4: v1(69.5,9.6) 69.6,9.6 70.7,10.7 v1(75.8,10.7) ; v1@69.5,9.75 ccw(c69.5,10.354) 69.927,9.927 ; U2.9@74.09,28.27 v1@75.67,28.27 ; 75.265,28.27 ccw(c75.265,28.735) v1@75.594,28.406 ; v1@75.694,10.594 ccw(c75.438,10.338) 75.438,10.7 ccw(c75.438,11.062) v1@75.694,10.806
  Bottom Layer w0.4: R3.1@60.6,6.618 63.582,9.6 v1(69.5,9.6) ; R3.1@60.6,7.18 ccw(c60.6,8.536) 61.559,7.577 ; R3.1@61.035,6.745 cw(c61.779,6.745) 61.253,7.27 ; v1@69.394,9.494 ccw(c69.138,9.238) 69.138,9.6 ccw(c69.138,9.962) v1@69.394,9.706 ; v1@75.594,28.194 cw(c75.338,27.938) 75.7,27.938 cw(c76.062,27.938) v1@75.806,28.194 ; 75.7,11.304 ccw(c76.404,11.304) v1@75.906,10.806 ; v1(75.7,28.3) 75.7,10.8 v1(75.8,10.7)
pads on no net: P2.4 P2.6 P4.9 P4.10

## Polygon pours and split planes (outlines as drawn)
GND on Top Layer "Top Layer-No Net" (solid, remove dead copper, pour order 4): -0.229,-0.025 103.351,-0.025 103.351,54.915 -0.229,54.915
GND on Bottom Layer "Top Layer-No Net" (solid, remove dead copper, pour order 3): 0,0 103.58,0 103.58,54.94 0,54.94

## Keep-outs
Keep-Out Layer:
  the board outline again, w0.05

## Other copper
Bottom Layer:
  rectangle net 3V3: 55.4,10.4 58.8,14.9
  rectangle net 3V3: 49.9,5.5 56.1,14.9
  rectangle net GND: 29.7,5.7 38.1,14.7

## Text inside footprints (layer, text, board x,y; h text height)
P1: Top Overlay "20" at 7.758,40.454 h0.89 r90; Top Overlay "19" at 10.298,40.454 h0.89 r90; Top Overlay "1" at 10.298,13.53 h0.89 r90; Top Overlay "2" at 7.758,13.53 h0.89 r90
P2: Top Overlay "2" at 60.55,6.302 h0.89; Top Overlay "1" at 61.058,3.762 h0.89; Top Overlay "7" at 72.5,3.7 h0.89; Top Overlay "8" at 72.5,6.3 h0.89
P4: Top Overlay "2" at 95.822,35.01 h0.89 r270; Top Overlay "1" at 93.282,34.502 h0.89 r270; Top Overlay "9" at 93.282,20.786 h0.89 r270; Top Overlay "10" at 95.822,20.786 h0.89 r270